# Altium PCB XUF208_Clock.PcbDoc
Units mil, origin at the board's own origin, x right, y up, seen from the top; angles counter-clockwise.
Board outline 1259.84 x 1909.45 mil, 2 copper layers (Top Layer, Bottom Layer); 18 components, 12 nets, 75 pads, 47 vias.
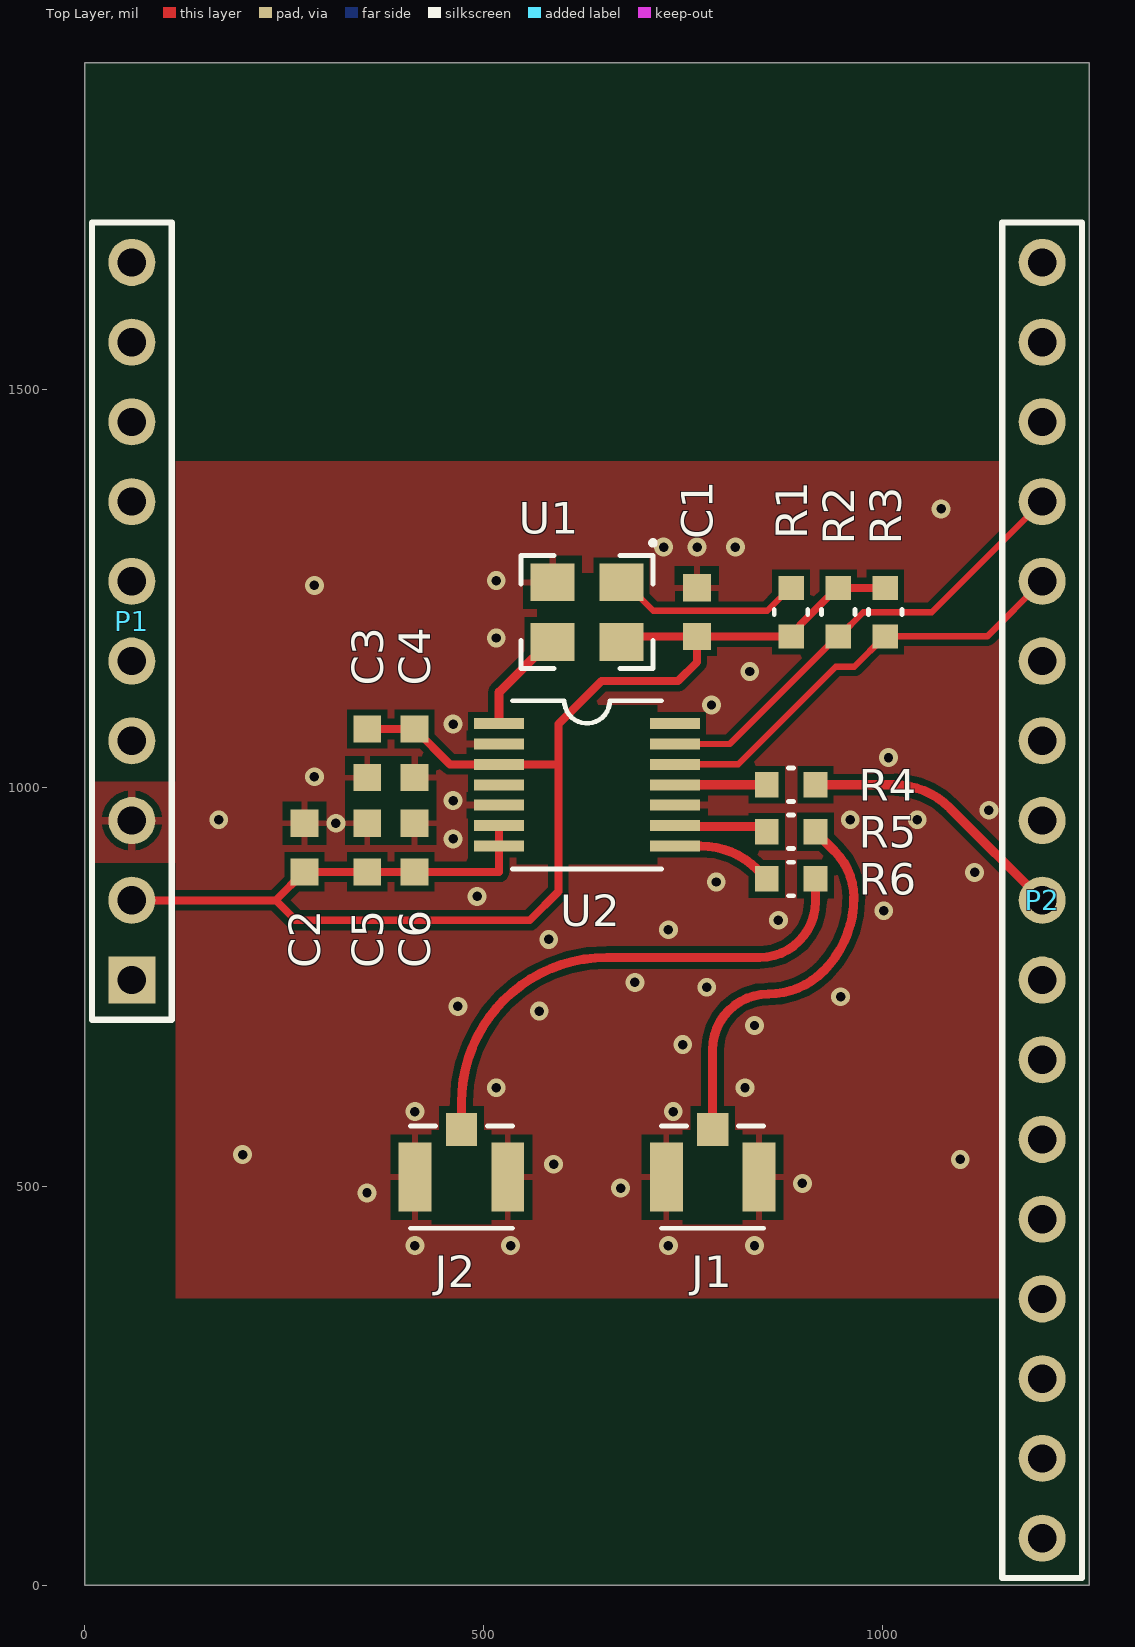
[diagram p0: Top Layer view]
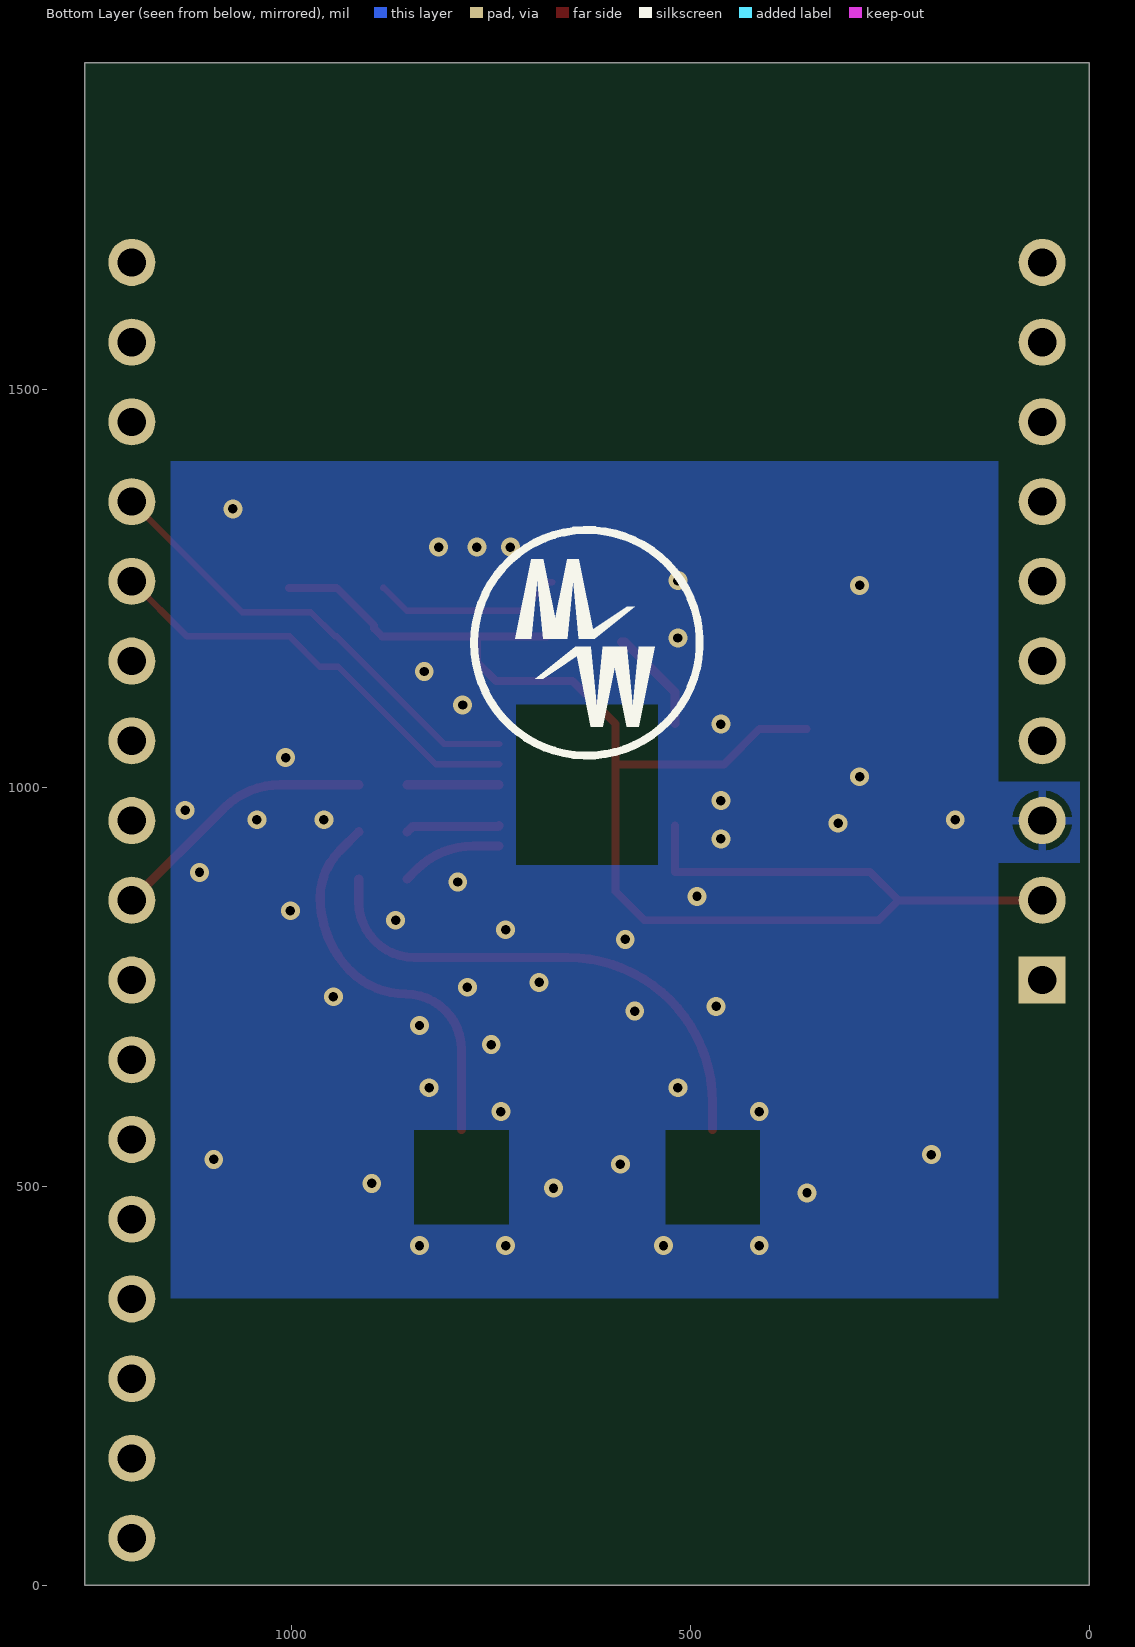
[diagram p1: Bottom Layer view, seen from below]
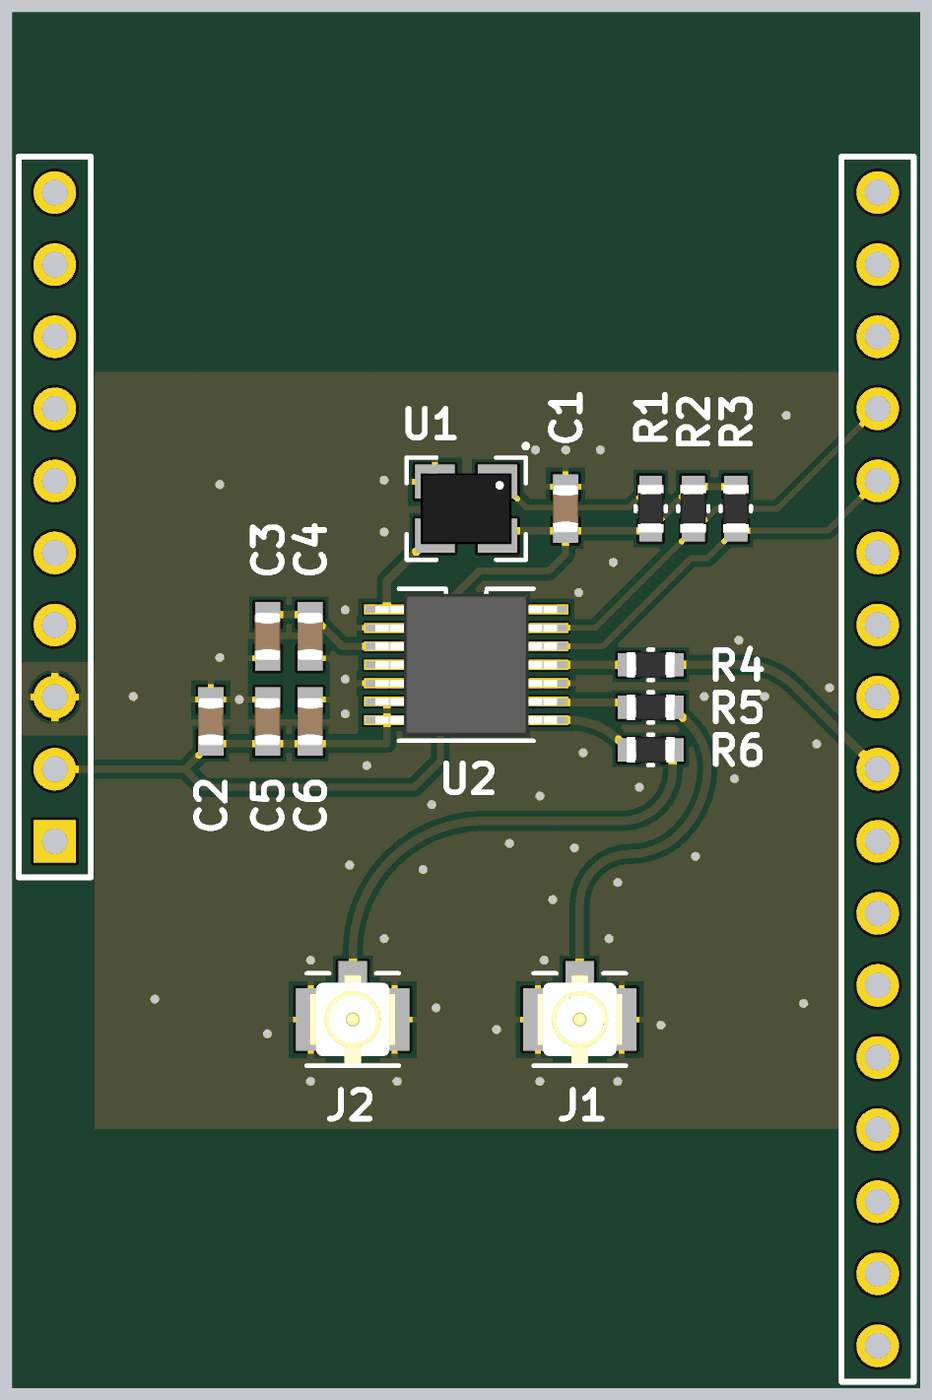
[diagram p2: 3D render of the assembled board from above, using the file's embedded part models]

## Layer stack, top to bottom
Top Solder: solder mask 0.4, Solder Resist, Dk 3.5
Top Layer: signal copper 1.4
Dielectric 1: dielectric 12.6, FR-4, Dk 4.8
Bottom Layer: signal copper 1.4
Bottom Solder: solder mask 0.4, Solder Resist, Dk 3.5

## Board outline
0,0 0,1909.45 1259.84,1909.45 1259.84,0

## Design rules (kind name [scope] priority, off if disabled: settings)
BoardOutlineClearance [All] p1: gap=7.87 ignorepadtopadclearanceinfootprint=FALSE except(15.75: Arc-SplitBarrior Arc-SplitContinuation Track-SplitBarrior Track-SplitContinuation SMDPad-SplitBarrior SMDPad-SplitContinuation THPad-SplitBarrior THPad-SplitContinuation Via-SplitBarrior Via-SplitContinuation Fill-SplitBarrior Fill-SplitContinuation Poly-SplitBarrior Poly-SplitContinuation Region-SplitBarrior Region-SplitContinuation Text-SplitBarrior Text-SplitContinuation)
Clearance "Clearance Bottom Layer" [OnLayer('Bottom Layer')] p1: gap=8 ignorepadtopadclearanceinfootprint=TRUE except(10: Arc-Text Track-Text SMDPad-Text THPad-Text Via-Text Fill-Text Poly-Text Region-Text Text-Text)
Clearance "Clearance Top Layer" [OnLayer('Top Layer')] p2: gap=8 ignorepadtopadclearanceinfootprint=TRUE except(10: Arc-Text Track-Text SMDPad-Text THPad-Text Via-Text Fill-Text Poly-Text Region-Text Text-Text)
Clearance [All] p3: gap=7.87 ignorepadtopadclearanceinfootprint=FALSE except(3.5: Arc-Arc Arc-Track Arc-SMDPad Track-Track Track-SMDPad SMDPad-SMDPad; 5: Arc-Via Track-Via SMDPad-Via THPad-Via Via-Via; 10: Arc-Text Track-Text SMDPad-Text THPad-Text Via-Text Fill-Text Poly-Text Region-Text Text-Text)
HoleSize [All] p1: absolutevalues=TRUE maxlimit=248.03 minlimit=7.87 maxpercent=80.000 minpercent=20.000
MinimumAnnularRing [All] p1: minimumring=3
MinimumSolderMaskSliver [All] p1: minsoldermaskwidth=3.94
PolygonConnect PolygonConnect_1 [All] p1: thpad.connectstyle=Relief thpad.reliefconductorwidth=10 thpad.reliefentries=4 thpad.polygonreliefangle="90 Angle" thpad.airgapwidth=8 smdpad.connectstyle=Relief smdpad.reliefconductorwidth=8 smdpad.reliefentries=4 smdpad.polygonreliefangle="90 Angle" smdpad.airgapwidth=10 via.connectstyle=Direct via.reliefconductorwidth=20 via.reliefentries=4 via.polygonreliefangle="90 Angle" via.airgapwidth=10
RoutingCorners [All] p1: cornerstyle=Round minsetback=100 maxsetback=100
RoutingVias [All] p1: holewidth=19.68 width=39.37 viastyle="Through Hole" minholewidth=7.87 minwidth=17.72 maxholewidth=39.37 maxwidth=78.74
SilkToSilkClearance [All] p1: silktosilkclearance=3.94
SilkToSolderMaskClearance [IsPad] p1: minsilkscreentomaskgap=3.94 clearancetoexposedcopper=TRUE
SolderMaskExpansion [All] p1: expansion=4 istentingtop=FALSE
Width [All] p1: maxlimit=100 minlimit=3.5 preferedwidth=15
25 further rules are at their usual default settings.

## Components (designator, comment, footprint, x,y, rotation, side; value= is the part's Value field where it differs from the comment)
C1 "MLCC" CAP_0603 767.72,1220.47 r270 top value=100nF
C2 "MLCC" CAP_0603 275.59,925.2 r270 top value=4.7uF
C3 "MLCC" CAP_0603 354.33,1043.31 r90 top value=1uF
C4 "MLCC" CAP_0603 413.39,1043.31 r90 top value=100nF
C5 "MLCC" CAP_0603 354.33,925.2 r270 top value=1uF
C6 "MLCC" CAP_0603 413.39,925.2 r270 top value=100nF
J1 "RF Connector" "RF CONNECTOR (1)" 787.4,511.81 r180 top
J2 "RF Connector" "RF CONNECTOR (1)" 472.44,511.81 r180 top
P1 "Header 10" HDR1X10 59.06,759.06 r90 top locked
P2 "Header 17" HDR1X17 1200.79,1659.06 r270 top locked
R1 "RES" RC0603N 885.83,1220.47 r270 top value=10K
R2 "RES" RC0603N 944.88,1220.47 r90 top value=4.7K
R3 "RES" RC0603N 1003.94,1220.47 r90 top value=4.7K
R4 "RES" RC0603N 885.83,1003.94 r180 top value=33
R5 "RES" RC0603N 885.83,944.88 r180 top value=33
R6 "RES" RC0603N 885.83,885.83 r180 top value=33
U1 "XO" QFN_3225_4P 629.92,1220.47 r180 top
U2 "CDCE913" PW14 629.92,1003.94 r0 top value=Value

## Footprints (in the part's own frame and the unit in brackets; to place one, negate y for a bottom-side part, rotate by r counter-clockwise, add the part's x,y. Pads: shape width x height; smd on the part's side, far side on the other; paste and mask are expansions set on the pad)
CAP_0603 [mil]
  rect 34x35 smd: 1(-30.5,0) 2(30.5,0)
  body extent -33,-18 33,18, height 35
HDR1X10 [mm] "Connector; Header; 10 Position"
  rect 1.5x1.5 hole 0.9: 1(0,0)
  round 1.5 hole 0.9: 2(2.54,0) 3(5.08,0) 4(7.62,0) 5(10.16,0) 6(12.7,0) 7(15.24,0) 8(17.78,0) 9(20.32,0) 10(22.86,0)
  silkscreen extent -1.27,-1.27 24.13,1.27
HDR1X17 [mm] "Connector; Header; 17 Position"
  round 1.5 hole 0.9: 1(0,0) 2(2.54,0) 3(5.08,0) 4(7.62,0) 5(10.16,0) 6(12.7,0) 7(15.24,0) 8(17.78,0) 9(20.32,0) 10(22.86,0) 11(25.4,0) 12(27.94,0) 13(30.48,0) 14(33.02,0) 15(35.56,0) 16(38.1,0) 17(40.64,0)
  silkscreen extent -1.27,-1.27 41.91,1.27
PW14 [mm]
  rect 1.6x0.35 smd paste-0.05 mask+0.07: 1(-2.8,1.95) 2(-2.8,1.3) 3(-2.8,0.65) 4(-2.8,0) 5(-2.8,-0.65) 6(-2.8,-1.3) 7(-2.8,-1.95) 8(2.8,-1.95) 9(2.8,-1.3) 10(2.8,-0.65) 11(2.8,0) 12(2.8,0.65) 13(2.8,1.3) 14(2.8,1.95)
  silkscreen extent -2.37,-2.68 2.37,2.68, body extent -3.2,-2.5 3.2,2.5, height 1.13
QFN_3225_4P [mm]
  rect 1.4x1.2 smd: 1(-1.1,-0.95) 2(1.1,-0.95) 3(1.1,0.95) 4(-1.1,0.95)
  silkscreen extent -2.18,-2.28 2.1,1.8, body extent -1.6,-1.25 1.6,1.25, height 0.8
RC0603N [mil]
  rect 30x32 smd: 1(-30.5,0) 2(30.5,0)
  silkscreen extent -3,-21 3,21, body extent -33,-18 33,18, height 22
"RF CONNECTOR (1)" [mm] "IPEX"
  rect 1x1.05 smd: 1(0,-1.525)
  rect 1.05x2.2 smd: 2(-1.475,0) 3(1.475,0)
  silkscreen extent -1.63,-1.63 1.63,1.63, body extent -1.5,-1.55 1.5,1.55, height 1.25

## Part data
C1 C2 C3 C4 C5 C6: "Multilayer Ceramic Capacitors", Tolerance=10%, VoltageRatingDC=5V
J1 J2: "VAO ITEM, MINI RF HEADER", Built_By="Gordon Mak"
P1: "Header, 10-Pin", LatestRevisionDate=17-Jul-2002, LatestRevisionNote="Re-released for DXP Platform.", Publisher="Altium Limited"
P2: "Header, 17-Pin", LatestRevisionDate=17-Jul-2002, LatestRevisionNote="Re-released for DXP Platform.", Publisher="Altium Limited"
R1 R2 R3 R4 R5 R6: "Chip Resistors", PowerRating=0.25W
U1: "SiTime Ultra Performance Oscillator", Frequency="27 MHz", Manufacturer=SiTime, ComponentLink1Description="Manufacturer URL", ComponentLink1URL=https://www.sitime.com, ComponentLink2Description=Datasheet, ComponentLink2URL=https://www.sitime.com/datasheet/SiT8208
U2: "CDCE(L)913: Flexible Low Power LVCMOS Clock Generator With SSC Support for EMI Reduction", Manufacturer="Texas Instruments", Manufacturer_Part_Number=CDCE913PWR, Built_By=EMA_UL_Team, Copyright="Copyright (C) 2018 Accelerated Designs. All rights reserved", RefDes=RefDes, Type=DEV

## Via types
v1: diameter 23.62, hole 11.81, Top Layer to Bottom Layer, tented both sides, 47 vias

## Nets (pads, with @x,y where several pads share a name; then routed paths per layer and width w, separated by ;. In a path a pad name is that pad's centre, name@x,y a point inside that pad or via, vN(x,y) a via of type N, cw(c..) or ccw(c..) an arc to the next point about the centre after c; other vN are vias at no path point)
3V3: C1.2 C2.2 C3.2 C4.2 C5.2 C6.2 P1.2 R1.2 R2.2 R3.2 U1.4 U2.3 U2.6 U2.7 | length 1970.9
  Top Layer w10: P1.2 239.45,859.06 ; C3.2 C4.2 413.89,1073.81 458.17,1029.53 U2.3 594,1029.53 ; U2.6 U2.7 519.69,894.7 C6.2 C5.2 C2.2 275.09,894.7 239.45,859.06 ; U1.4@680.13,1189.97 C1.2 ; R3.2 R2.2 943.88,1250.97 896.83,1203.92 896.83,1199.97 886.83,1189.97 R1.2 C1.2 ; 239.45,859.06 264.5,834 558,834 594,870 594,1029.53 ; 594,1029.53 594,1080 648,1134 744,1134 767.72,1157.72 C1.2
CLK: P2.9 R4.1 | length 340.2
  Top Layer w11.55: R4.1 1014.48,1003.94 cw(c1014.48,903.94) 1085.19,974.65 P2.9
GND: C1.1 C2.1 C3.1 C4.1 C5.1 C6.1 J1.2 J1.3 J2.2 J2.3 P1.3 U1.2 U2.2 U2.5 U2.10
  other v1: 414,426 534,426 732,426 840,426 354,492 672,498 900,504 588,528 1098,534 198,540 414,594 738,594 516,624 828,624 750,678 840,702 570,720 468,726 948,738 780,750 690,756 582,810 732,822 870,834 1002,846 492,864 792,882 1116,894 462,936 315,955.7 168,960 960,960 1044,960 1134,972 462,984 288,1014 1008,1038 462,1080 786,1104 834,1146 516,1188 288,1254 516,1260 726,1302 768,1302 816,1302 1074,1350
NetJ1_1: J1.1 R5.1 | length 487.6
  Top Layer w11.55: J1.1 787.4,632.01 ; 787.4,632.06 787.4,671.53 787.4,671.59 cw(c857.33,671.59) 857.36,741.52 ccw(c857.34,839.01) 926.38,770.18 ccw(c833.91,862.49) 964.57,862.49 964.57,862.54 ccw(c882.12,862.49) 940.42,920.79 940.35,920.86 R5.1
NetJ2_1: J2.1 R6.1 | length 649.7
  Top Layer w11.55: J2.1 472.44,605.28 cw(c654.56,605.28) 654.56,787.4 846.46,787.4 ccw(c846.46,857.27) 916.33,857.27 R6.1
NetR1_1: R1.1 U1.1 | length 239.5
  Top Layer w8: U1.1 677.17,1257.87 713.07,1221.97 855.83,1221.97 884.83,1250.97 R1.1
NetR4_2: R4.2 U2.11 | length 115.2
  Top Layer w11.55: U2.11 R4.2
NetR5_2: R5.2 U2.9 | length 118.4
  Top Layer w11.55: U2.9 741.27,951.64 848.57,951.64 R5.2
NetR6_2: R6.2 U2.8 | length 128
  Top Layer w11.55: U2.8 772.57,927.17 cw(c772.57,827.17) 843.28,897.88 R6.2
NetU1_3: U1.3 U2.1 | length 132.4
  Top Layer w11.55: U2.1 519.69,1120.08 582.68,1183.07 U1.3
SCL: P2.5 R3.1 U2.12 | length 555.7
  Top Layer w8: U2.12 819.53,1029.53 942,1152 964.96,1152 1002.94,1189.97 R3.1 1131.7,1189.97 P2.5
SDA: P2.4 R2.1 U2.13 | length 586.5
  Top Layer w8: U2.13 809.03,1055.12 943.88,1189.97 R2.1 945.88,1189.97 976.38,1220.47 1062.2,1220.47 P2.4
pads on no net: P1.1 P1.4 P1.5 P1.6 P1.7 P1.8 P1.9 P1.10 P2.1 P2.2 P2.3 P2.6 P2.7 P2.8 P2.10 P2.11 P2.12 P2.13 P2.14 P2.15 P2.16 P2.17 U2.4 U2.14

## Polygon pours and split planes (outlines as drawn)
GND on Top Layer "GND_L01_P000" (solid, remove dead copper, pour order 0): 12,1008 114,1008 114,1410 1152,1410 1152,360 114,360 114,906 12,906
GND on Bottom Layer "GND_L02_P001" (solid, remove dead copper, pour order 1): 12,1008 114,1008 114,1410 1152,1410 1152,360 114,360 114,906 12,906

## Other copper
Top Layer:
  pour cut-out: 541.42,1104.44 541.42,903.44 718.42,903.44 718.42,1104.44
  pour cut-out: 566.93,1171.26 566.93,1234.25 614.17,1234.25 614.17,1269.68 692.91,1269.68 692.91,1171.26
  pour cut-out: 750,570.87 750,452.76 824.8,452.76 824.8,570.87
  pour cut-out: 435.04,570.87 435.04,452.76 509.84,452.76 509.84,570.87
Bottom Layer:
  pour cut-out: 413.39,570.87 413.39,452.76 531.5,452.76 531.5,570.87
  pour cut-out: 728.35,570.87 728.35,452.76 846.46,452.76 846.46,570.87
  pour cut-out: 541.42,1104.44 541.42,903.44 718.42,903.44 718.42,1104.44

## Silkscreen, mask and mechanical layers (free items; w line width, h text height)
Bottom Overlay:
  circle w10: c630,1182 r141.51
  region: 545,1177 565,1077 575,1077 565,1177
  region: 600,1177 580,1077 570,1077 580,1177
  region: 590,1177 610,1077 620,1077 610,1177
  region: 645,1177 625,1077 615,1077 625,1177
  region: 625,1177 685,1137 695,1137 645,1177
  region: 640,1187 580,1227 570,1227 620,1187
  region: 620,1187 640,1287 650,1287 640,1187
  region: 675,1187 655,1287 645,1287 655,1187
  region: 665,1187 685,1287 695,1287 685,1187
  region: 720,1187 700,1287 690,1287 700,1187
Mechanical 1:
  the board outline again, w0.5